# EAGLE board FD Capacitance Sensor v03 (EAGLE 9.5.2)
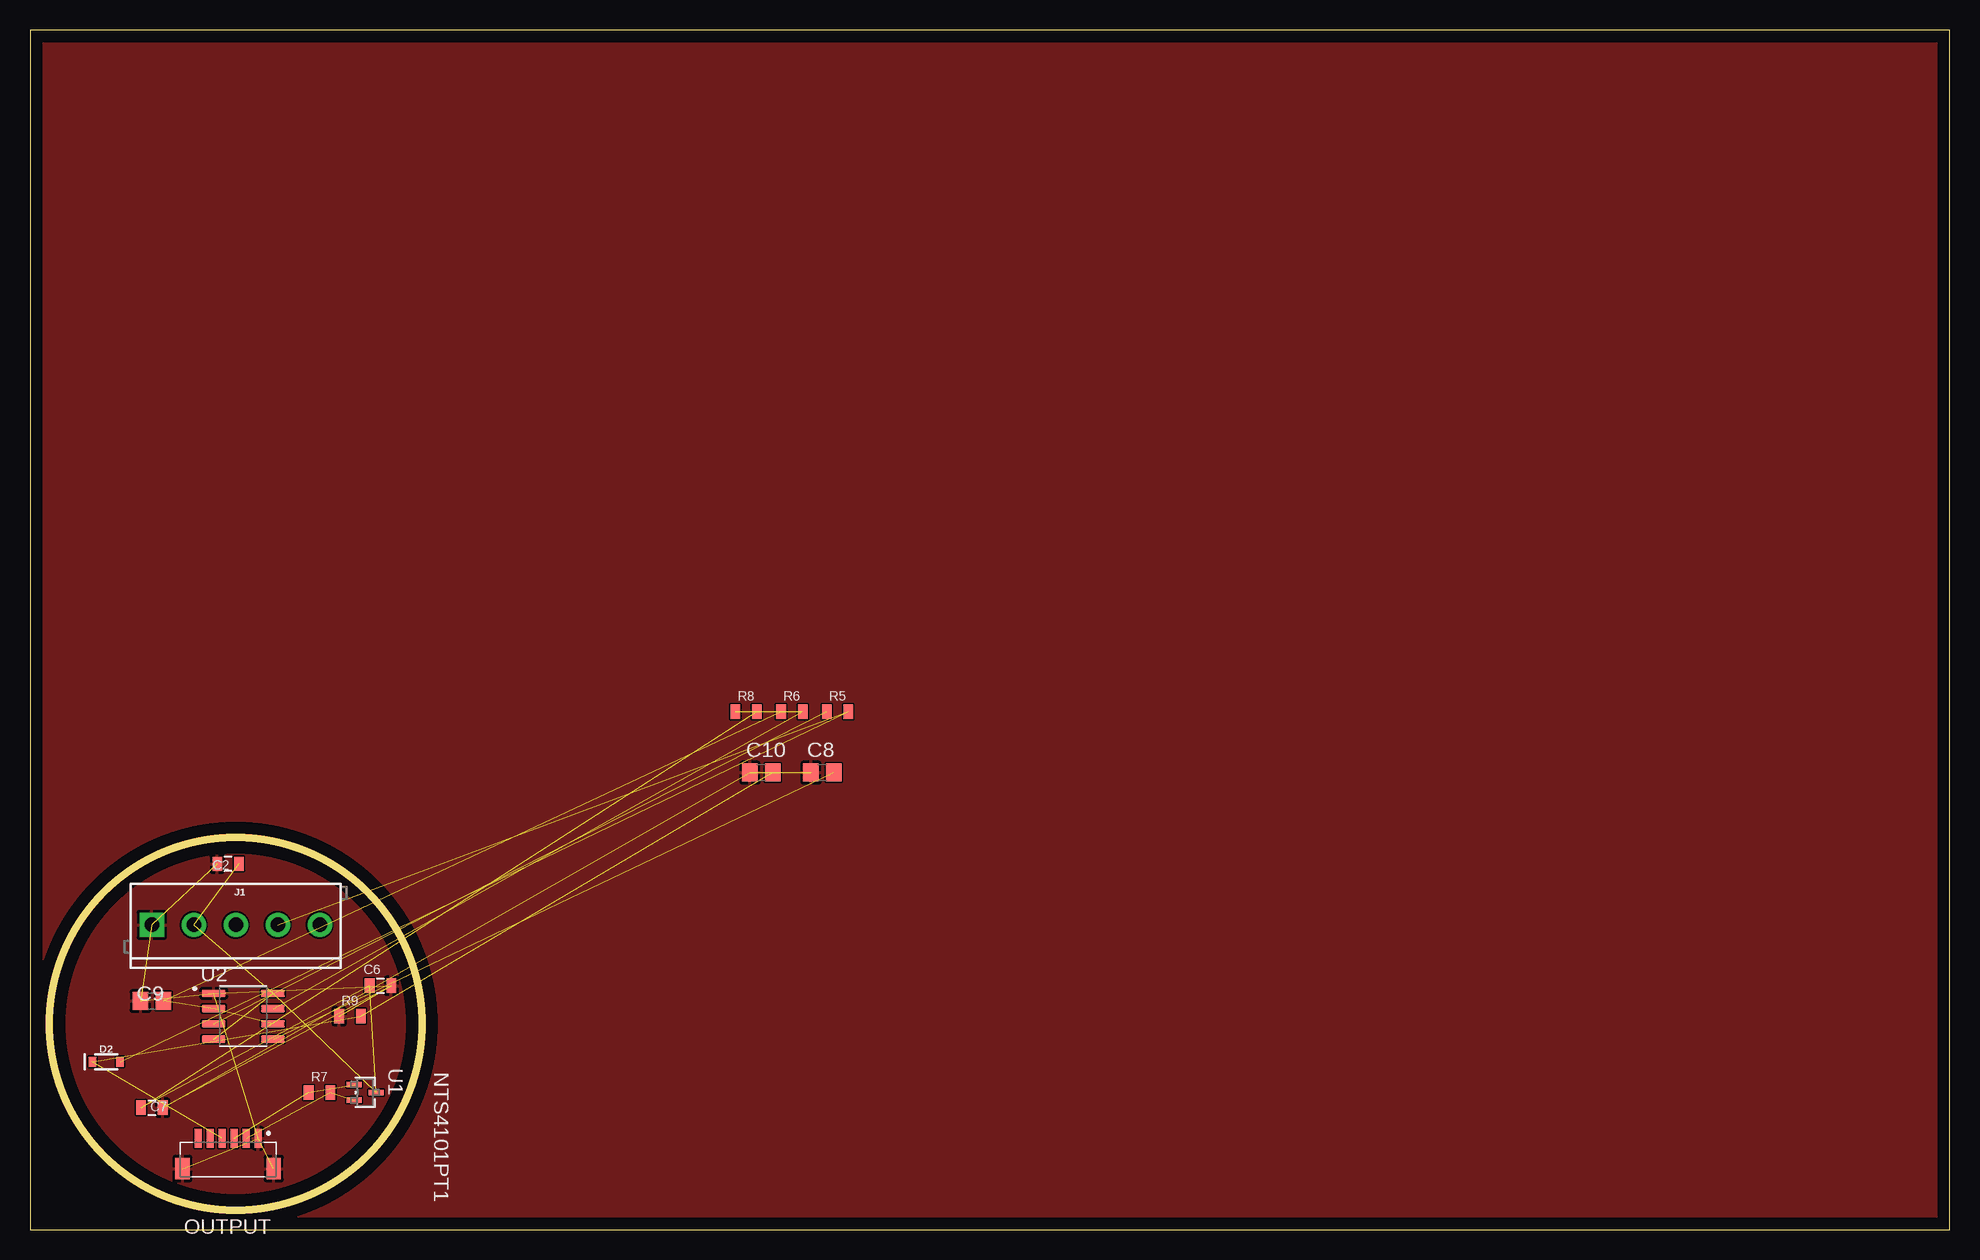
[diagram p0: board, top side]

Size 160 x 100 mm. Coordinates in mm from the lower left corner, seen from the top.
Outline: 0,0 160,0 160,100 0,100 0,0
Outline: circle at 17.16,17.16 radius 15.5
Copper layers (1*16): Top 0.035mm / dielectric 1.5mm / Bottom 0.035mm
Design rules "default": minimum track width 6mil, minimum drill 0.35mm, track to track 6mil, track to pad 6mil, pad to pad 6mil, via to via 6mil, smd to smd 6mil, copper to edge 40mil, drill to drill 6mil, minimum pad ring 10mil, minimum via ring 8mil, stop-mask expansion 4mil, vias tented up to drill 0mil, thermal gap 10mil

## Footprints (pad centres in the part's own frame; a part is rotated, then mirrored left to right if it is on the bottom)
0805@1 = smd 0.8 x 1.2: 1 -0.9,0; 2 0.9,0
C0805 = smd 1.3 x 1.5: 1 -0.95,0; 2 0.95,0
SOD-323 = smd 0.63 x 0.83: A 1.15,0; C -1.15,0
SCREWTERMINAL-3.5MM-5 = drill 1.2 pad 2.032 square: 1 0,0 | drill 1.2 pad 2.032: 2 3.5,0; 3 7,0; 4 10.5,0; 5 14,0
JST_BM06B-SRSS-TB(LF)(SN) = smd 0.6 x 1.55: 1 -2.5,-2.525; 2 -1.5,-2.525; 3 -0.5,-2.525; 4 0.5,-2.525; 5 1.5,-2.525; 6 2.5,-2.525 | smd 1.2 x 1.8: S1 -3.8,0; S2 3.8,0
0805 = smd 0.8 x 1.2: 1 -0.9,0; 2 0.9,0
SOT_101PT1_ONS = smd 0.457 x 1.27: 1 -0.65,-0.914; 2 0.65,-0.914; 3 0,0.914
SOIC127P599X175-8N = smd 1.97 x 0.6: 1 -2.47,1.905; 2 -2.47,0.635; 3 -2.47,-0.635; 4 -2.47,-1.905; 5 2.47,-1.905; 6 2.47,-0.635; 7 2.47,0.635; 8 2.47,1.905

## Placement (x,y rotation side)
C2  1uF  [0805@1]  16.51,30.48 180 top
C6  10nF  [0805@1]  29.21,20.32 0 top
C7  0.1uF  [0805@1]  10.16,10.16 0 top
C8  10nf  [C0805]  66.04,38.1 0 top
C9  470pf  [C0805]  10.16,19.05 0 top
C10  1uF  [C0805]  60.96,38.1 0 top
D2  250mA/100V  [SOD-323]  6.35,13.97 0 top
FRAME1  FRAME-LETTERNO_PACKAGE  [DUMMY]  46.99,46.99 0 top
J1  [SCREWTERMINAL-3.5MM-5]  10.16,25.4 0 top
OUTPUT  BM06B-SRSS-TBT(LF)(SN)  [JST_BM06B-SRSS-TB(LF)(SN)]  16.51,5.08 180 top
R5  10k  [0805]  67.31,43.18 0 top
R6  1k  [0805]  63.5,43.18 0 top
R7  100k  [0805]  24.13,11.43 0 top
R8  330  [0805]  59.69,43.18 0 top
R9  1M  [0805]  26.67,17.78 0 top
U1  NTS4101PT1  [SOT_101PT1_ONS]  27.94,11.43 270 top
U2  TLC555CD  [SOIC127P599X175-8N]  17.78,17.78 0 top

## Library data of the parts
C2 = Custom Components; HOUSEPART: yes; MPN: MF-CAP-0805-1uF; POPULATE: 1; URL: https://factory.macrofab.com/part/MF-CAP-0805-1uF
C6 = Custom Components; DIGIKEY: 399-C0805X103K1RAC3316CT-ND; HOUSEPART: NO; MPN: C0805X103K1RAC3316; POPULATE: 1; URL: https://www.digikey.com/en/products/detail/kemet/C0805X103K1RAC3316/10315780
C7 = Custom Components; HOUSEPART: YES; MPN: MF-CAP-0805-0.1uF; POPULATE: 1; URL: https://factory.macrofab.com/part/MF-CAP-0805-0.1uF
C8-C10 = rcl
D2 = Custom Components; MPN: BAS16HT1G
FRAME1 = SparkFun-Aesthetics; DESIGNER: Nobody; VERSION: v01
J1 = SparkFun-Connectors; PROD_ID: Combine 8288+8399
OUTPUT = Custom Components; MPN: BM06B-SRSS-TBT(LF)(SN); POPULATE: 1
R5 = Custom Components; MPN: MF-RES-0805-10K; POPULATE: 1; URL: https://factory.macrofab.com/part/MF-RES-0805-10K
R6 R9 = Custom Components; HOUSEPART: YES; MPN: MF-RES-0805-1K; POPULATE: 1; URL: https://factory.macrofab.com/part/MF-RES-0805-1k
R7 = Custom Components; MPN: MF-RES-0805-100K; POPULATE: 1; URL: https://factory.macrofab.com/part/MF-RES-0805-100K
R8 = Custom Components; HOUSEPART: YES; MPN: MF-RES-0805-330; POPULATE: 1
U1 = Custom Components; DATASHEET: https://datasheet.octopart.com/NTS4101PT1-ON-Semiconductor-datasheet-139013286.pdf; MANUFACTURER_PART_NUMBER: NTS4101PT1; SOURCELIBRARY: ON_Semiconductor_2020-03-06; VENDOR: ON Semiconductor
U2 = Custom Components; DESCRIPTION: 2.1-MHz, 250-A, Low-Power Timer 8-SOIC 0 to 70; DIGI-KEY_PART_NUMBER: 296-52992-ND; MF: Texas Instruments; MP: TLC555CD; PACKAGE: SOIC-8 Texas Instruments; PURCHASE-URL: https://pricing.snapeda.com/search/part/TLC555CD/?ref=eda

## Nets
!EN: OUTPUT.3 R7.1 U1.1
+3V3: OUTPUT.2 R7.2 U1.2
GND: C2.2 C6.2 C7.2 C8.1 C9.1 C10.1 J1.1 OUTPUT.1 OUTPUT.S1 OUTPUT.S2 R9.1 U2.1
N$1: C8.2 U2.5
N$5: R5.1 U2.3
N$8: C9.2 R6.1 U2.2 U2.6
N$9: R6.2 R8.1 U2.7
NC: OUTPUT.6
OUTPUT1: C10.2 D2.C OUTPUT.4 R9.2
OUTPUT2: OUTPUT.5
SENSOR1: D2.A J1.4 R5.2
SENSOR2: J1.5
SHEILD: J1.3
VCC: C2.1 C6.1 C7.1 J1.2 R8.2 U1.3 U2.4 U2.8

## Tracks (layer width: path | path; a pad name or v marks a point on that pad's centre or on a via)
!EN  (2 unrouted)
+3V3  (2 unrouted)
GND  (11 unrouted)
  pour Top: -3.81,-5.08 -3.81,106.68 168.91,106.68 168.91,104.14 168.91,-6.35 -3.81,-6.35
N$1  (1 unrouted)
N$5  (1 unrouted)
N$8  (3 unrouted)
N$9  (2 unrouted)
OUTPUT1  (3 unrouted)
SENSOR1  (2 unrouted)
VCC  (7 unrouted)